# Altium PCB sync_rectification_module_smd.PcbDoc
Units mm, origin at the board's own origin, x right, y up, seen from the top; angles counter-clockwise.
Board outline 38 x 18 mm, 2 copper layers (Top Layer, Bottom Layer), stack 1.636 mm thick; 20 components, 18 nets, 66 pads, 24 vias.
Unrouted connection lines stored in the file: 19.
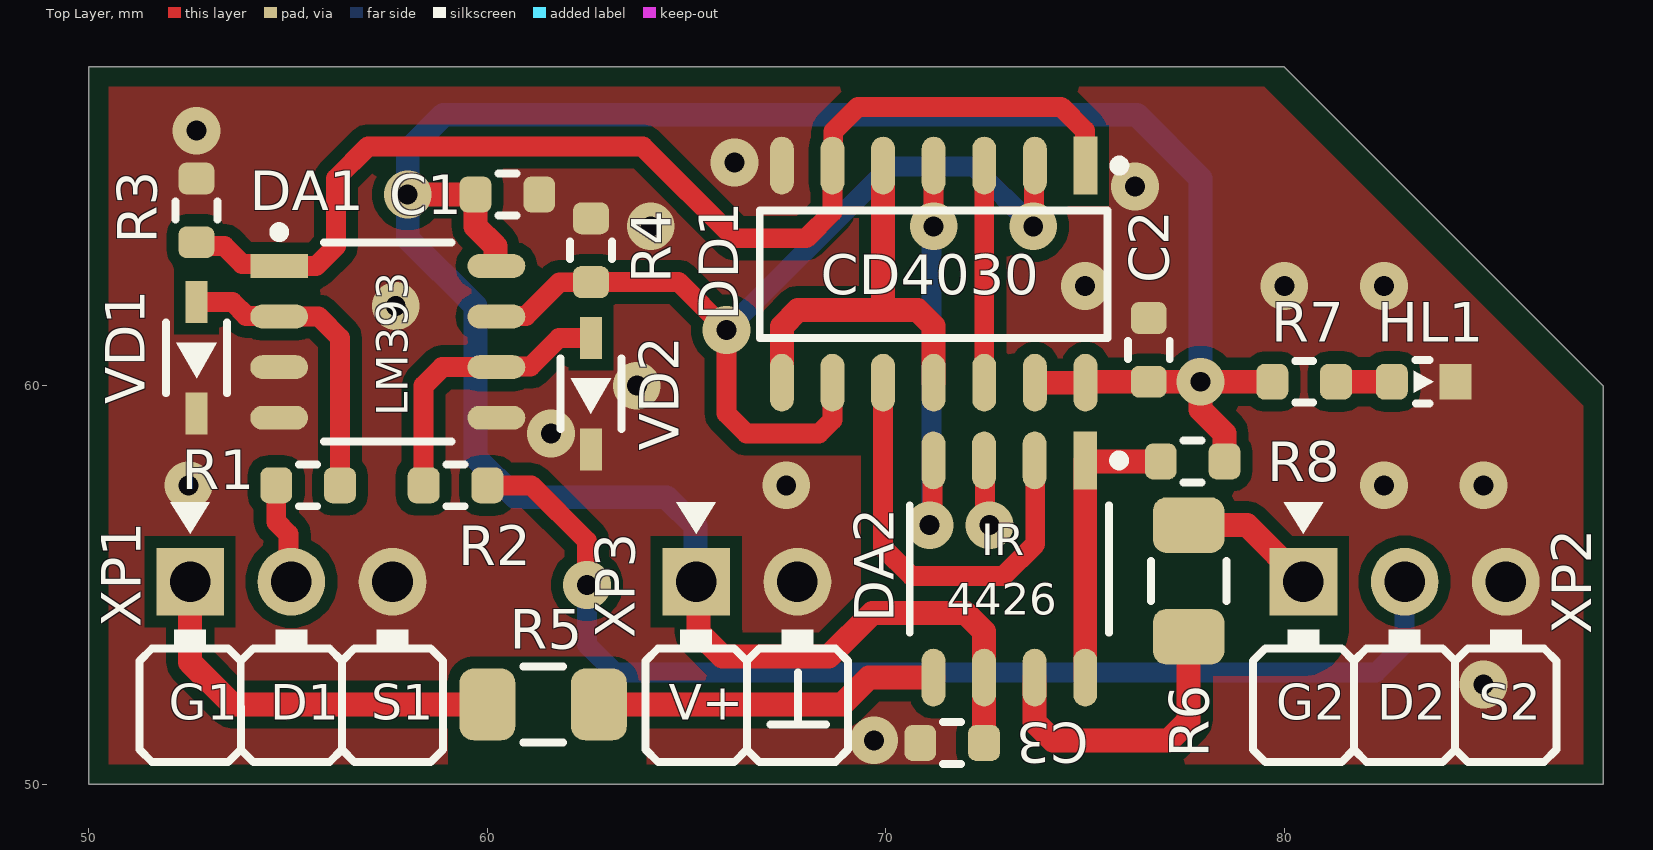
[diagram p0: Top Layer view]
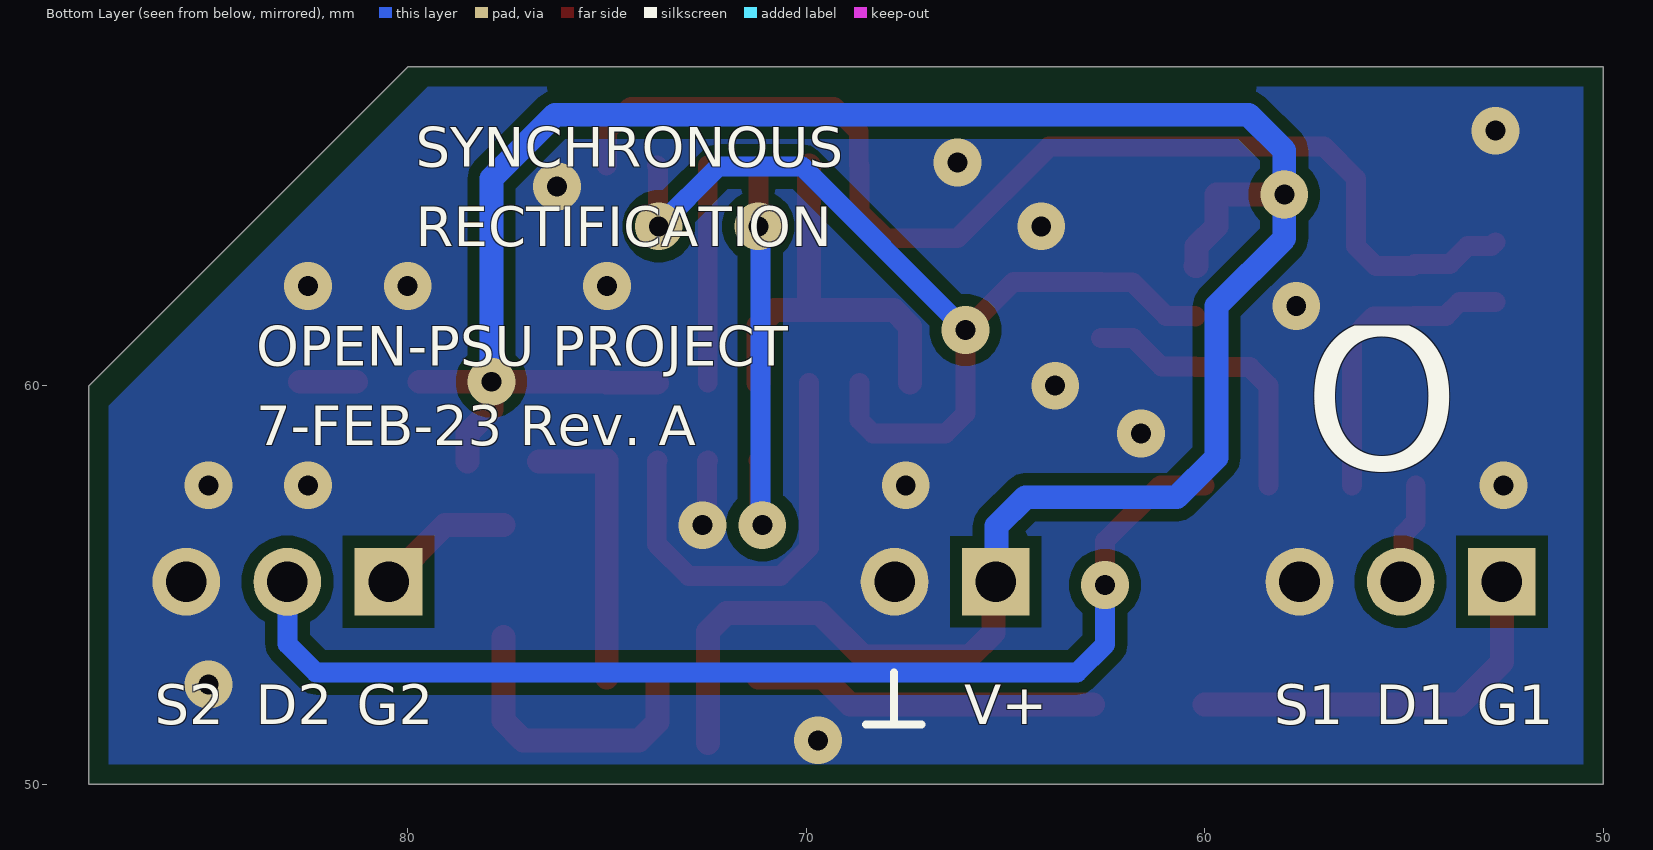
[diagram p1: Bottom Layer view, seen from below]
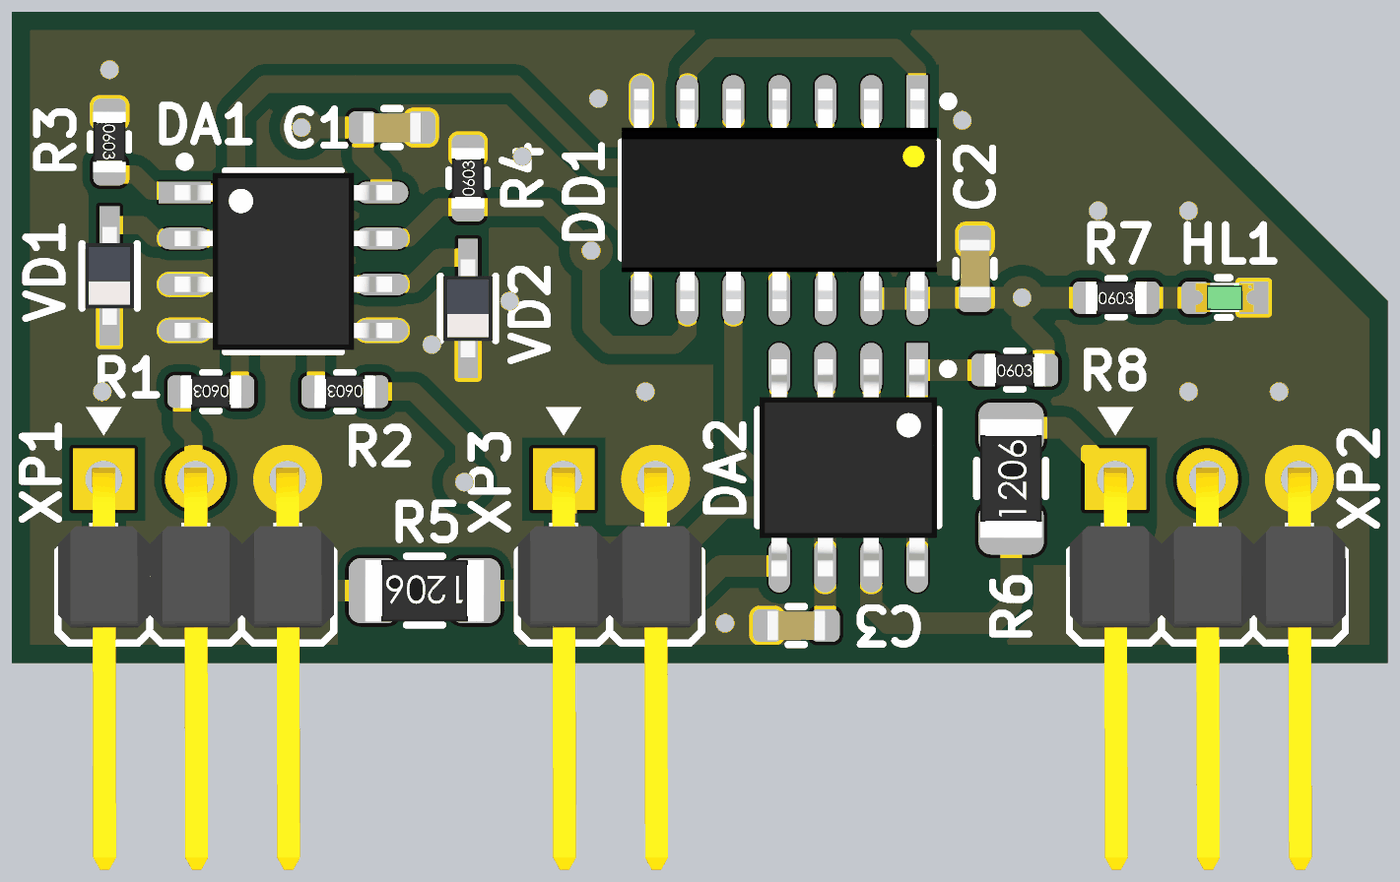
[diagram p2: 3D render of the assembled board from above, using the file's embedded part models]

## Layer stack, top to bottom
Top Solder: solder mask 0.025, Solder Resist, Dk 3.5
Top Layer: signal copper 0.018
Dielectric 1: dielectric 1.6, FR-4, Dk 4.8
Bottom Layer: signal copper 0.018
Bottom Solder: solder mask 0.025, Solder Resist, Dk 3.5

## Board outline
50,50 50,68 80,68 88,60 88,50

## Design rules (kind name [scope] priority, off if disabled: settings)
Clearance [All] p1: gap=0.3 ignorepadtopadclearanceinfootprint=FALSE
MinimumSolderMaskSliver [All] p1: minsoldermaskwidth=0.2
PlaneClearance [All] p1: clearance=0.5
PlaneConnect [All] p1: planeconnectstyle=Direct reliefexpansion=0.508 reliefentries=4 reliefconductorwidth=0.254 reliefairgap=0.254
PolygonConnect [All] p1: connectstyle=Direct reliefconductorwidth=0.254 reliefentries=4 polygonreliefangle="90 Angle" airgapwidth=0.254
RoutingVias [All] p1: holewidth=0.5 width=1 viastyle="Through Hole" minholewidth=0.5 minwidth=1 maxholewidth=5 maxwidth=2.5
SilkToSilkClearance [All] p1: silktosilkclearance=0.2
SilkToSolderMaskClearance [IsPad] p1: minsilkscreentomaskgap=0.1 clearancetoexposedcopper=TRUE
SolderMaskExpansion [All] p1: expansion=0.1 istentingtop=FALSE
Width [All] p1: maxlimit=2.5 minlimit=0.3 preferedwidth=0.5 minimp=50.000000 maximp=50.000000 favimp=50.000000
25 further rules are at their usual default settings.

## Components (designator, comment, footprint, x,y, rotation, side; value= is the part's Value field where it differs from the comment)
C1 "0.1u" CAP0603 60.5,64.8 r0 top
C2 "0.1u" CAP0603 76.6,60.9 r90 top
C3 "0.1u" CAP0603 71.665,51.035 r180 top
DA1 "LM393DR" SOIC-8 57.5,61.1 r0 top
DA2 "TPM27523-SO1R" SOIC-8 73.1,55.4 r270 top
DD1 "CD4030BM" SOIC-14 71.2,62.8 r270 top
HL1 "KP-1608SGC" LED0603G 83.5,60.1 r180 top
R1 "2k" RES0603B 55.5,57.5 r180 top
R2 "2k" RES0603B 59.2,57.5 r180 top
R3 "4.7k" RES0603B 52.7,64.4 r270 top
R4 "4.7k" RES0603B 62.6,63.4 r90 top
R5 "3.6" RES1206B 61.4,52 r180 top
R6 "3.6" RES1206B 77.6,55.1 r90 top
R7 "1k" RES0603B 80.5,60.1 r0 top
R8 "4.7k" RES0603B 77.7,58.1 r0 top
VD1 "1N4448WS" SOD-323F 52.7,60.7 r90 top
VD2 "1N4448WS" SOD-323F 62.6,59.8 r90 top
XP1 "PLS-3R" PLS-3R 52.54,55.08 r0 top locked
XP2 "PLS-3R" PLS-3R 80.48,55.08 r0 top locked
XP3 "PLS-2R" PLS-2R 65.24,55.08 r0 top locked

## Footprints (in the part's own frame and the unit in brackets; to place one, negate y for a bottom-side part, rotate by r counter-clockwise, add the part's x,y. Pads: shape width x height; smd on the part's side, far side on the other; paste and mask are expansions set on the pad)
CAP0603 [mm] "Capacitor 0603"
  rrect50% 0.8x0.9 smd: 1(-0.8,0) 2(0.8,0)
  silkscreen extent -0.23,-0.53 0.23,0.53, body extent -0.8,-0.41 0.8,0.41, height 0.82
LED0603G [mm] "LED 0603 Green"
  rect 0.8x0.9 smd: 1(-0.8,0)
  rrect50% 0.8x0.9 smd: 2(0.8,0)
  silkscreen extent -0.25,-0.55 0.25,0.55, body extent -0.8,-0.4 0.8,0.4, height 0.6
PLS-2R [mm]
  rect 1.7x1.7 hole 1.02: 1(0,0)
  round 1.7 hole 1.02: 2(2.54,0)
  silkscreen extent -1.27,-4.53 3.81,1.99, body extent -1.27,-10.8 3.82,0.32, height 3.09
PLS-3R [mm]
  rect 1.7x1.7 hole 1.02: 1(0,0)
  round 1.7 hole 1.02: 2(2.54,0) 3(5.08,0)
  silkscreen extent -1.27,-4.53 6.35,1.99, body extent -1.27,-10.8 6.36,0.32, height 3.09
RES0603B [mm] "Resistor 0603"
  rrect50% 0.8x0.9 smd: 1(-0.8,0) 2(0.8,0)
  silkscreen extent -0.23,-0.53 0.23,0.53, body extent -0.85,-0.45 0.85,0.45, height 0.56
RES1206B [mm] "Resistor 1206"
  rrect50% 1.4x1.8 smd: 1(-1.4,0) 2(1.4,0)
  silkscreen extent -0.5,-0.95 0.5,0.95, body extent -1.65,-0.85 1.65,0.85, height 0.66
SOD-323F [mm]
  rect 1.05x0.55 smd: 1(-1.4,0) 2(1.4,0)
  silkscreen extent -0.89,-0.76 0.89,0.76, body extent -1.35,-0.68 1.35,0.67, height 0.79
SOIC-8 [mm] "SOIC-8 package"
  rect 1.45x0.6 smd paste+0 mask+0.05: 1(-2.725,1.905)
  oval 1.45x0.6 smd paste+0 mask+0.05: 2(-2.725,0.635) 3(-2.725,-0.635) 4(-2.725,-1.905) 5(2.725,-1.905) 6(2.725,-0.635) 7(2.725,0.635) 8(2.725,1.905)
  silkscreen extent -2.85,-2.5 1.6,2.88, body extent -3,-2.45 3,2.45, height 1.75
SOIC-14 [mm] "package SOIC-14, 150 mil"
  rect 1.45x0.6 smd paste+0 mask+0.05: 1(-2.725,3.81)
  oval 1.45x0.6 smd paste+0 mask+0.05: 2(-2.725,2.54) 3(-2.725,1.27) 4(-2.725,0) 5(-2.725,-1.27) 6(-2.725,-2.54) 7(-2.725,-3.81) 8(2.725,-3.81) 9(2.725,-2.54) 10(2.725,-1.27) 11(2.725,0) 12(2.725,1.27) 13(2.725,2.54) 14(2.725,3.81)
  silkscreen extent -2.85,-4.37 1.6,4.78, body extent -3.07,-4.35 3.07,4.35, height 1.73

## Part data
C1 C2 C3: library part C0603, "Capacitors 0603 package case", Dielectric=X7R, Manufacturer="Samsung Sdi Co. Ltd", Package=0603, Part Number=CL10B104KB8NNNC, Tolerance="± 10 %", Voltage=50V, Value on schem=0.1u
DA1: "Dual Comparator", Manufacturer="Texas Instruments", Package=SO-8, Part Number=LM393DR
DA2: "Dual 5-A High-speed, Low-side Gate Driver", Manufacturer=3PEAK, Package="SOIC8 (150 mil)", Part Number=TPM27523-SO1R
DD1: "Quad XOR-Gate", Manufacturer="Texas Instruments", Package=SOIC-14, Part Number=CD4030BM
HL1: "Super bright green led (package case 0603)", Color="Super bright green", Manufacturer="Kingbright Company LLC.", Package=0603, Part Number=KP-1608SGC
R1 R2: library part R0603, "Resistor 0603 package case", Manufacturer=Yageo, Package=0603, Part Number=RC0603FR-072KL, Tolerance="± 1 %", Value on schem=2k
R3 R4 R8: library part R0603, "Resistor 0603 package case", Manufacturer=Yageo, Package=0603, Part Number=RC0603FR-074K7L, Tolerance="± 1 %", Value on schem=4.7k
R5 R6: library part R1206, "Resistor 1206 package case", Manufacturer=Yageo, Package=1206, Part Number=RC1206FR-073R6L, Temperature coefficient=±200/°C, Tolerance="± 1 %", Voltage=200V, Value on schem=3.6
R7: library part R0603, "Resistor 0603 package case", Manufacturer=Yageo, Package=0603, Part Number=RC0603FR-071KL, Tolerance="± 1 %", Value on schem=1k
VD1 VD2: "Diode 75V, 150mA", Manufacturer="ON Semiconductor", Package=SOD-323F, Part Number=1N4448WS

## Via types
v1: diameter 1.2, hole 0.5, Top Layer to Bottom Layer, tented both sides, 24 vias

## Nets (pads, with @x,y where several pads share a name; then routed paths per layer and width w, separated by ;. In a path a pad name is that pad's centre, name@x,y a point inside that pad or via, vN(x,y) a via of type N, cw(c..) or ccw(c..) an arc to the next point about the centre after c; other vN are vias at no path point)
D1: R1.2 XP1.2 | length 2.6
  Top Layer w0.5: R1.2 54.7,56.584 55.011,56.274 55.011,55.149 XP1.2
D2: R2.1 XP2.2 | length 28.3
  Top Layer w0.5: R2.1 61.1,57.5 62.5,56.1 v1(62.5,55)
  Bottom Layer w0.5: v1(62.5,55) 62.5,53.5 63.2,52.8 82.3,52.8 83.02,53.52 XP2.2
G1: R5.2 XP1.1 | length 9.9
  Top Layer w0.6: XP1.1 52.54,53.06 53.6,52 R5.2
G2: R6.2 XP2.1 | length 3.5
  Top Layer w0.6: R6.2 79.06,56.5 XP2.1
GND: C1.2 C2.2 C3.2 DA1.3 DA1.4 DA1.5 DA2.3 DD1.7 HL1.1 R3.1 R4.2 VD1.1 VD2.1 XP1.3 XP2.3 XP3.2 | length 1.7
  Top Layer w0.5: DA2.3 72.484,58.106 72.484,56.616 v1(72.6,56.5)
  other v1: 69.7,51.1 85,52.5 52.5,57.5 67.5,57.5 82.5,57.5 85,57.5 61.6,58.8 63.75,60 57.7,62 75,62.5 80,62.5 82.5,62.5 64.1,64 76.25,65 66.2,65.6 52.7,66.4
NetDA1_1: DA1.1 DD1.1 DD1.6 R3.2 | length 29.4
  Top Layer w0.5: R3.2 52.797,63.503 53.397,63.503 53.845,63.055 54.725,63.055 DA1.1 54.78,63 55.7,63 56.2,63.5 56.2,65.2 57,66 63.9,66 66.2,63.7 68,63.7 68.66,64.36 DD1.6 68.679,65.544 68.679,66.379 69.3,67 74.4,67 75,66.4 75,65.535 DD1.1
NetDA1_2: DA1.2 R1.1 VD1.2 | length 7.7
  Top Layer w0.5: VD1.2 53.6,62.1 53.946,61.754 54.756,61.754 DA1.2 55.765,61.735 56.3,61.2 R1.1
NetDA1_6: DA1.6 R2.2 VD2.2 | length 7.2
  Top Layer w0.5: R2.2 58.4,60 58.865,60.465 DA1.6 60.244,60.484 61.084,60.484 61.8,61.2 VD2.2
NetDA1_7: DA1.7 DD1.2 DD1.9 R4.1 | length 24.2
  Top Layer w0.5: DA1.7 60.244,61.754 60.967,61.754 61.809,62.597 62.597,62.597 R4.1 64.8,62.6 v1(66,61.4) 66,59.3 66.5,58.8 68.32,58.8 68.66,59.14 DD1.9 ; v1(73.7,64) 73.721,64.021 73.721,65.506 DD1.2
  Bottom Layer w0.5: v1(66,61.4) 70.1,65.5 72.2,65.5 v1(73.7,64)
NetDA2_1: DA2.1 DA2.8 R8.1 | length 7.1
  Top Layer w0.6: DA2.8 DA2.1@75.005,58.1 ; DA2.1 DA2.1@75.005,58.1 ; R8.1@76.7,58.1 DA2.1@75.005,58.1
NetDA2_2: DA2.2 DD1.10 | length 10.7
  Top Layer w0.5: DD1.10 69.93,55.934 70.641,55.222 72.949,55.222 73.75,56.024 73.75,58.11 DA2.2
NetDA2_4: DA2.4 DD1.4 | length 10.7
  Top Layer w0.5: v1(71.1,56.5) 71.176,56.576 71.176,58.106 DA2.4 ; v1(71.2,64) DD1.4
  Bottom Layer w0.5: v1(71.1,56.5) 71.15,56.55 71.15,63.95 v1(71.2,64)
NetDA2_5: DA2.5 R5.1 | length 8.7
  Top Layer w0.6: R5.1 68.9,52 69.575,52.675 DA2.5
NetDA2_7: DA2.7 R6.1 | length 7.5
  Top Layer w0.6: DA2.7 73.735,51.565 74.2,51.1 77.1,51.1 77.6,51.6 R6.1
NetDD1_3: DD1.3 DD1.12 | length 5.4
  Top Layer w0.5: DD1.12 DD1.3
NetDD1_5: DD1.5 DD1.8 DD1.11 | length 10.6
  Top Layer w0.6: DD1.8 67.39,61.49 67.8,61.9 69.9,61.9 ; DD1.5 69.93,61.93 69.9,61.9 ; DD1.11 71.2,61.1 71.2,61.5 70.8,61.9 69.9,61.9
NetHL1_2: HL1.2 R7.2 | length 1.4
  Top Layer w0.6: R7.2 HL1.2
VCC_STANDBY_12V0P: C1.1 C2.1 C3.1 DA1.8 DA2.6 DD1.13 DD1.14 R7.1 R8.2 XP3.1 | length 66.2
  Top Layer w0.6: v1(58,64.8) C1.1 59.7,64 60.2,63.5 60.2,63.005 DA1.8 ; XP3.1 65.3,55.02 65.3,53.8 65.9,53.2 68.568,53.2 69.668,54.3 72,54.3 72.465,53.835 DA2.6 C3.1 ; DD1.13 DD1.14 75.01,60.1 C2.1 v1(77.9,60.1) ; R8.2 78.5,58.8 77.9,59.4 v1(77.9,60.1) ; R7.1 v1(77.9,60.1)
  Bottom Layer w0.6: XP3.1 65.221,55.099 65.221,56.479 64.5,57.2 60.7,57.2 59.7,58.2 59.7,62 58,63.7 v1(58,64.8) 58,65.9 58.9,66.8 76.3,66.8 77.9,65.2 v1(77.9,60.1)

## Polygon pours and split planes (outlines as drawn)
GND on Top Layer "NONET_L-01_P-001" (solid, remove dead copper, pour order 1): 50.5,50.5 87.5,50.5 87.5,59.5 79.5,67.5 50.5,67.5
GND on Bottom Layer "NONET_L-01_P-001" (solid, remove dead copper, pour order 0): 50.5,50.5 87.5,50.5 87.5,59.5 79.5,67.5 50.5,67.5

## Other copper
Top Layer:
  pour cut-out: 76.988,53.93 81.63,53.93 cw(c80.403,53.93) 80.403,52.703 76.988,52.703
  pour cut-out: 69.369,58.239 69.369,54.3 70.6,54.3 70.6,58.239
  pour cut-out: 59.65,53.206 63.15,53.206 63.15,52.5 59.65,52.5
  pour cut-out: 59.003,52.514 59.003,50.5 64,50.5 64,52.514
  pour cut-out: 71.195,51.638 75.005,51.638 75.005,52.675 71.195,52.675
  pour cut-out: 75,60.712 75.617,60.712 75.617,52.4 75,52.4
  pour cut-out: 66.5,58.239 69.93,58.239 69.93,60.3 66.5,60.3

## Silkscreen, mask and mechanical layers (free items; w line width, h text height)
Top Overlay:
  lines w0.2: 67.1,51.5 68.5,51.5 ; 67.8,51.5 67.8,52.8
  text "CD4030" at 68.368,62.3 h1
  text "LM393" at 58,59.234 h0.8 r90
  text "IR" at 72.4,55.75 h0.8
  text "4426" at 71.534,54.25 h0.8
  text "G1" at 52.005,51.62 h0.9
  text "D1" at 54.545,51.62 h0.9
  text "S1" at 57.085,51.62 h0.9
  text "V+" at 64.555,51.62 h0.9
  text "G2" at 79.795,51.62 h0.9
  text "D2" at 82.335,51.62 h0.9
  text "S2" at 84.875,51.62 h0.9
Bottom Overlay:
  lines w0.2: 67.1,51.5 68.5,51.5 ; 67.8,51.5 67.8,52.8
  text "SYNCHRONOUS" at 79.8,65.5 h1
  text "RECTIFICATION" at 79.8,63.5 h1
  text "OPEN-PSU PROJECT" at 83.8,60.5 h1
  text "7-FEB-23 Rev. A" at 83.8,58.5 h1
  text "O" at 57.518,56.01 h10
  text "G1" at 53.166,51.5 h1
  text "D1" at 55.706,51.5 h1
  text "S1" at 58.246,51.5 h1
  text "V+" at 66.033,51.5 h1
  text "G2" at 81.273,51.5 h1
  text "D2" at 83.813,51.5 h1
  text "S2" at 86.353,51.5 h1
Outline:
  the board outline again, w0.2